# Altium PCB Instrumentation Amplifier (Emergency Version).PcbDoc
Units mil, origin at the board's own origin, x right, y up, seen from the top; angles counter-clockwise.
Board outline 2500 x 1000 mil, 2 copper layers (L1, L2), stack 62.756 mil thick; 18 components, 14 nets, 59 pads, 2 vias.
Unrouted connection lines stored in the file: 11.
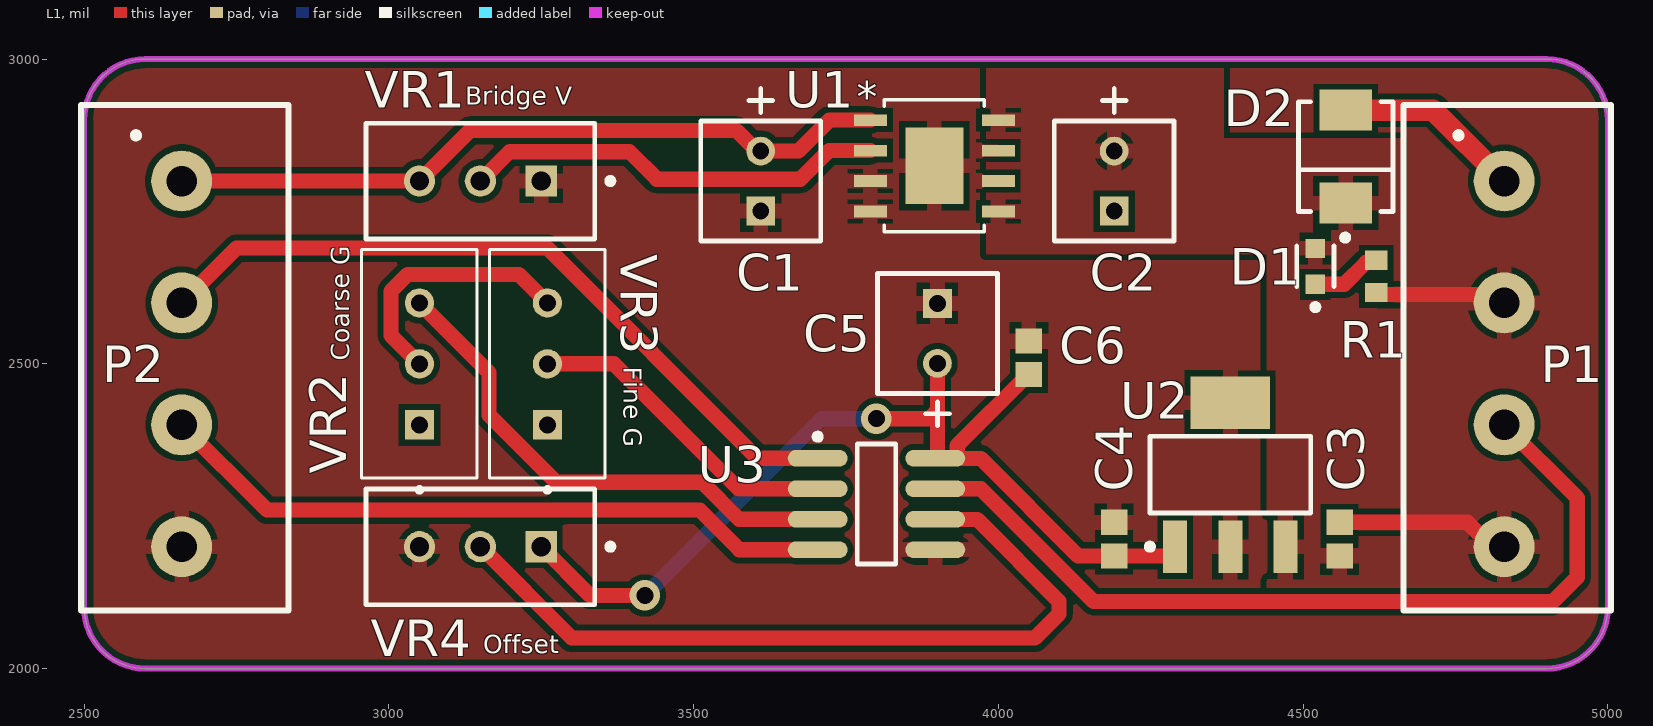
[diagram p0: L1 view]
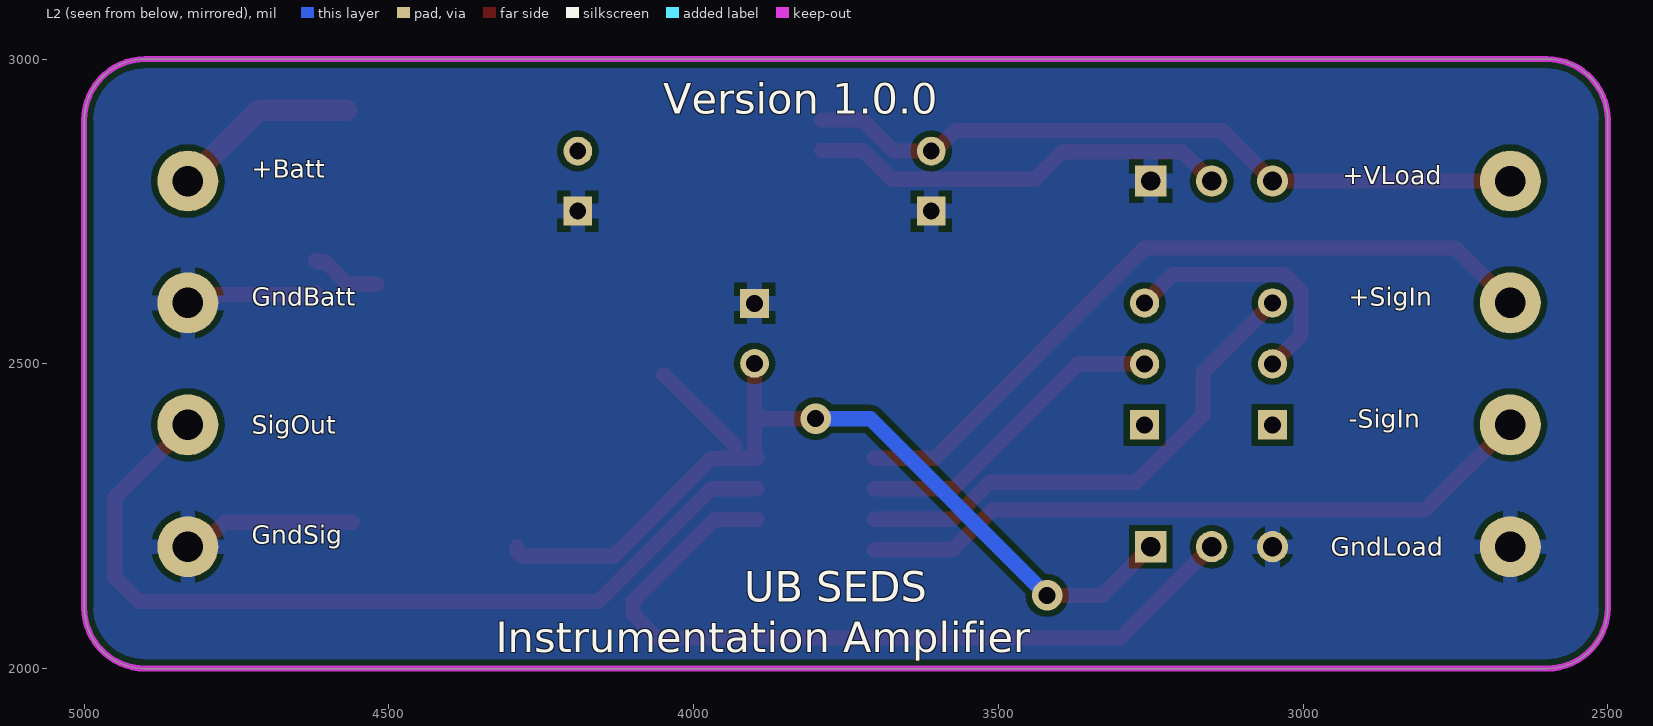
[diagram p1: L2 view, seen from below]
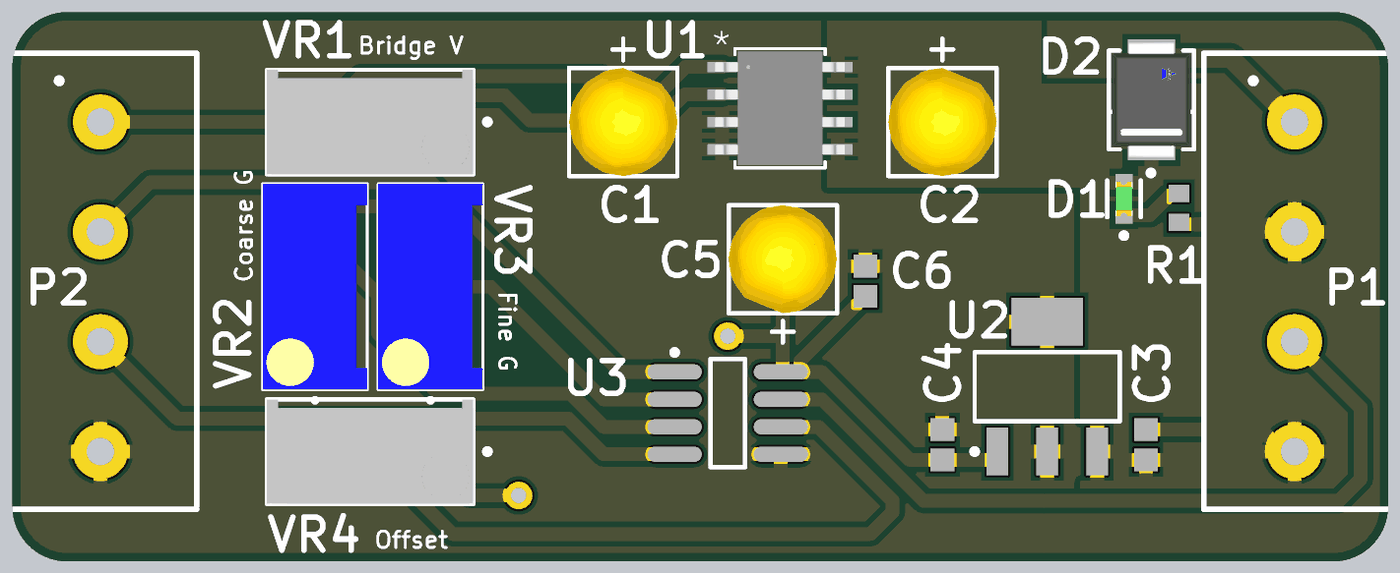
[diagram p2: 3D render of the assembled board from above, using the file's embedded part models]

## Layer stack, top to bottom
Top Solder: solder mask 0.1, Solder Resist, Dk 1
L1: signal copper 1.378
Core: dielectric 60, FR-4, Dk 4.6
L2: signal copper 1.378
Bottom Solder: solder mask 0.1, Solder Resist, Dk 1

## Board outline
4900,2000 ccw(c4900,2100) 5000,2100 5000,2900 ccw(c4900,2900) 4900,3000 2600,3000 ccw(c2600,2900) 2500,2900 2500,2100 ccw(c2600,2100) 2600,2000

## Design rules (kind name [scope] priority, off if disabled: settings)
Clearance [All] p1: gap=10 ignorepadtopadclearanceinfootprint=FALSE except(0: Arc-Hole Track-Hole SMDPad-Hole THPad-Hole Via-Hole Fill-Hole Poly-Hole Region-Hole Text-Hole)
PlaneConnect [All] p1: planeconnectstyle=Relief reliefexpansion=20 reliefentries=4 reliefconductorwidth=25 reliefairgap=10
PolygonConnect [All] p1: connectstyle=Relief reliefconductorwidth=25 reliefentries=4 polygonreliefangle="90 Angle" airgapwidth=10
RoutingVias [All] p1: holewidth=28 width=50 viastyle="Through Hole" minholewidth=28 minwidth=50 maxholewidth=28 maxwidth=50
SolderMaskExpansion [All] p1: expansion=4 istentingtop=FALSE
Width [All] p1: maxlimit=50 minlimit=10 preferedwidth=25
29 further rules are at their usual default settings.

## Components (designator, comment, footprint, x,y, rotation, side; value= is the part's Value field where it differs from the comment)
C1 "10 µF" FP-TAP106K016SCS-MFG 3610,2800 r90 top
C2 "10 µF" FP-TAP106K016SCS-MFG 4190,2800 r90 top
C3 "100 nF" CAPC1608X95X40ML15T15 4560,2212.44 r270 top
C4 "100 nF" CAPC1608X95X40ML15T15 4190,2212.44 r270 top
C5 "10 µF" FP-TAP106K016SCS-MFG 3900,2550 r270 top
C6 "100 nF" CAPC1608X95X40ML15T15 4050,2510 r270 top
D1 "LTST-C191KGKT" FP-LTST-C191KGKT-MFG 4520,2660 r90 top
D2 "VS-10BQ015-M3/5BT" FP-95401-MFG 4570,2840 r90 top value=390pF
P1 "Screw Terminal" "Screw Terminal" 4830,2800 r270 top
P2 "Screw Terminal" "Screw Terminal" 2660,2800 r270 top
R1 "470" RESC1608X55X30NL15T15 4620,2643.43 r270 top
U1 "BD00GA3WEFJ-E2" HTSOP-J8_ROM 3895,2825 r0 top
U2 "MCP1804T-A002I/DB" SOT-223-DB3_N 4380.55,2318.11 r90 top
U3 "AD8221ARZ-R7" ADI-R-8_M 3800,2270 r0 top
VR1 "10K" BOUR-3296W 3150,2800 r180 top
VR2 "20K" TRIM_3296W-1-202LF 3050,2500 r90 top
VR3 "100" TRIM_3296W-1-101LF 3260,2500 r90 top
VR4 "10K" BOUR-3296W 3150,2200 r180 top

## Footprints (in the part's own frame and the unit in brackets; to place one, negate y for a bottom-side part, rotate by r counter-clockwise, add the part's x,y. Pads: shape width x height; smd on the part's side, far side on the other; paste and mask are expansions set on the pad)
ADI-R-8_M [mm] "SOIC, 8-Leads, Body 4.9x3.9mm, Pitch 1.27mm, IPC Low Density"
  oval 2.5x0.7 smd: 1(-2.45,1.905) 2(-2.45,0.635) 3(-2.45,-0.635) 4(-2.45,-1.905) 5(2.45,-1.905) 6(2.45,-0.635) 7(2.45,0.635) 8(2.45,1.905)
  silkscreen extent -2.57,-2.5 0.8,2.93, body extent -2,-2.5 2,2.5, height 1.75
BOUR-3296W [mm] "THD, 3-Leads, Body 9.53x4.83mm, Pitch 2.54mm"
  rect 1.3x1.3 hole 0.8: 1(-2.54,0)
  round 1.3 hole 0.8: 2(0,0) 3(2.54,0)
  silkscreen extent -5.54,-2.41 4.76,2.42, body extent -4.76,-2.4 4.76,2.42, height 11.55
CAPC1608X95X40ML15T15 [mm] "Chip Capacitor, 2-Leads, Body 1.60x0.80mm, IPC Low Density"
  rect 1.05x1.1 smd: 1(-0.7,0) 2(0.7,0)
  body extent -0.88,-0.48 0.87,0.47, height 0.95
FP-95401-MFG [mil]
  rect 67.5x86 smd paste+0 mask+0: 1(-76.25,0) 2(76.25,0)
  silkscreen extent -138,-78 90,78, body extent -114,-81 114,81, height 10
FP-LTST-C191KGKT-MFG [mm]
  rect 0.8x0.8 smd paste+0 mask+0: 1(-0.75,0) 2(0.75,0)
  silkscreen extent -1.82,-0.77 0.85,0.77, body extent -1.25,-0.55 1.25,0.55, height 0.25
FP-TAP106K016SCS-MFG [mm]
  rect 1.2x1.2 hole 0.7 paste-1000 mask+0: 1(-1.25,0)
  round 1.2 hole 0.7 paste-1000 mask+0: 2(1.25,0)
  silkscreen extent -2.5,-2.5 3.85,2.5, body extent -2.6,-2.6 2.6,2.6, height 0.25
HTSOP-J8_ROM [mil]
  rect 54x19 smd paste+0 mask+0: 1(-105,75) 2(-105,25) 3(-105,-25) 4(-105,-75) 5(105,-75) 6(105,-25) 7(105,25) 8(105,75)
  rect 95x126 smd paste-62.5 mask+0: EPAD(0,0)
  silkscreen extent -82,-108 82,108, body extent -118,-104 118,104, height 39
RESC1608X55X30NL15T15 [mm] "Chip Resistor, 2-Leads, Body 1.60x0.80mm, IPC Medium Density"
  rect 0.8x0.95 smd: 1(-0.675,0) 2(0.675,0)
  body extent -0.87,-0.48 0.87,0.48, height 0.55
"Screw Terminal" [mil]
  round 100 hole 50 mask+4: 1(0,0) 2(200,0) 3(400,0) 4(600,0)
  silkscreen extent -125,-165 705,175
SOT-223-DB3_N [mm] "SOT223, 4-Leads, Body 6.5x3.5mm, Pitch 2.3mm, Lead Span 7mm, IPC Medium Density"
  rect 2.2x1 smd: 1(-3,2.3) 2(-3,0) 3(-3,-2.3)
  rect 2.2x3.3 smd: 4(3,0)
  silkscreen extent -3.12,-3.35 1.6,3.47, body extent -1.85,-3.35 1.85,3.35, height 1.8
TRIM_3296W-1-101LF [mm]
  rect 1.218x1.218 hole 0.71: 1(-2.54,0)
  round 1.218 hole 0.71: 2(0,0) 3(2.54,0)
  silkscreen extent -5.35,-2.41 4.76,2.42, body extent -4.76,-2.41 4.76,2.42, height 11.55
TRIM_3296W-1-202LF [mm]
  rect 1.218x1.218 hole 0.71: 1(-2.54,0)
  round 1.218 hole 0.71: 2(0,0) 3(2.54,0)
  silkscreen extent -5.35,-2.41 4.76,2.42, body extent -4.76,-2.41 4.76,2.42, height 11.55

## Part data
C1 C2 C5: library part CMP-04424-000616-1, "CAP TANT 10UF 10% 16V RADIAL", Capacitance=10uF, Case/Package=Dipped, Dielectric Material=Tantalum, ESR (Equivalent Series Resistance)=3.2R, Leakage Current=1.2uA, Max Operating Temperature=125°C, Min Operating Temperature=-55°C, Package Quantity=1000, Tolerance=10%, Voltage=16V, Construction=RADIAL, Diameter=5mm, Dissipation Factor=8%, Features="General Purpose", Height=9mm, Height - Seated (Max)=0.354inch, Lead Diameter=0.5mm, Lead Free="Lead Free", Lead Pitch=2.5mm, Length=9mm, Life (Hours)=1000Hour, Mount="Through Hole", Number of Pins=2, Packaging=Bulk, Polarity=Polar, Radiation Hardening=No, RoHS Compliant=Yes, Series=TAP, Size=9mm, Termination=Radial, Voltage Rating=16V, Voltage Rating (DC)=16V
C3 C4 C6: library part CMP-2006-01550-1, Manufacturer=Vitramon, Part Number=VJ0603Y104KXQCW1BC
D1: library part CMP-2000-05198-2, "LED GREEN CLEAR SMD", Case Code (Imperial)=0603, Case Code (Metric)=1608, Color=Green, Forward Current=30mA, Forward Voltage=2V, Lens Color=Colorless, Max Operating Temperature=85°C, Max Power Dissipation=75mW, Min Operating Temperature=-55°C, Package Quantity=1, Reverse Voltage=5V, Test Current=20mA, Case/Package=0603, Depth=0.8mm, Dominant Wavelength=571nm, Height=0.55mm, Illumination Color=Green, Lead Free="Lead Free", Length=1.6mm, Lens Style=Rectangular, Lens Transparency=Clear, Luminous Intensity=35mcd, Mount="Surface Mount", Number of Elements=1, Number of LEDs=1, Number of Pins=2, Packaging="Tape and Reel", Power Dissipation=75mW, Power Rating=75mW, Radiation Hardening=No, Viewing Angle=130°, Wavelength=574nm, Width=0.8mm
D2: library part CMP-02539-000017-1, "DIODE SCHOTTKY 15V 1A DO214AA", Capacitance=390pF, Forward Current=1A, Manufacturer=Vishay, Max Junction Temp=+125°C, Max Repetitive Reverse Voltage=15V, Max Surge Forward Current=40A, Package=95401, Peak Reverse Current=0.5mA, Temperature="-55°C to +125°C", Temperature Range Low=-55°C, Automotive=No, Category=Diode, ComponentLink2Description=Datasheet, ComponentLink2URL=http://www.vishay.com/docs/93349/vs-10bq015m.pdf, Device Class L1="Discrete Semiconductors", Device Class L2=Diodes, Device Class L3="Schottky Diodes", Digikey Description="DIODE SCHOTTKY 15V 1A DO214AA", Footprint Url=http://www.vishay.com/docs/95401/smb.pdf, Height=2.44mm, Lead Free=Yes, Manufacturer Part Number=VS-10BQ015-M3/5BT, Mouser Description="VS-10BQ015 Series 15 V 1 A SMT Schottky Rectifier - SMB (DO-214AA)", Octopart=https://octopart.com/vs-10bq015-m3%2F5bt-vishay-39003459, Reverse Voltage=15V, RoHS=TRUE, Standoff Height=0mm, Temperature Range High=+125°C
P1 P2: "200 mil pitch"
R1: library part CMP-2000-00795-1, "ERJ-3GEYJ471V", Manufacturer=Panasonic, Part Number=ERJ-3GEYJ471V
U1: "No Description Available", Mfr_Name="ROHM Semiconductor", Copyright="Copyright (C) 2022 Ultra Librarian. All rights reserved.", Digi-Key_Part_Number_1=BD00GA3WEFJ-E2TR-ND, Digi-Key_Part_Number_2=BD00GA3WEFJ-E2CT-ND, Digi-Key_Part_Number_3=BD00GA3WEFJ-E2DKR-ND, Manufacturer_Part_Number=BD00GA3WEFJ-E2, RefDes=RefDes, Type=DEV
U2: library part CMP-0136-00501-1, "150 mA, 28V LDO Regulator With Shutdown, 3-Pin SOT-223, Industrial Temperature, Tape and Reel", DatasheetVersion="revB, Nov-2009", PackageDescription="3-Lead Plastic Small Outline Transistor (DB) [SOT-223]", PackageReference=SOT-223-DB3, PackageVersion="revBB, Aug-2009"
U3: library part CMP-0934-00044-1, "Precision Instrumentation Amplifier, 2 V/us, -40 to 125 degC, 8-Pin SOIC (R-8), RoHS, Tape and Reel", Manufacturer="Analog Devices", Quiescent Current="0.9 mA Typ.", Temperature Range="-40 to 125 degC", -3dB Bandwidth@G="1=825 kHz", ComponentLink1Description="Manufacturer URL", ComponentLink1URL=http://www.analog.com/en/index.html, ComponentLink2Description=Datasheet, ComponentLink2URL=http://www.analog.com/static/imported-files/data_sheets/AD8221.pdf, ComponentLink3Description="Package Specification", ComponentLink3URL=http://www.analog.com/static/imported-files/packages/PKG_PDF/SOIC_Narrow%20(R)/R_8.pdf, DatasheetVersion="Rev. C", Mounting Technology="Surface Mount", PackageDescription="8-Pin Standard Small Outline Package, Body 4.9 x 3.9 mm, Pitch 1.27 mm", PackageVersion=Jun-06, Packing="Tape and Reel", PartNumber=AD8221ARZ-R7, RoHS=TRUE, Slew Rate@G="1=2 V/us Typ.", VIO="60 uV Max."
VR1 VR4: library part CMP-1747-00001-1, "3296W-1-103LF / Square Trimpot(R) Trimming Potentiometer, 10 KOhm, +/- 10%, 0.5 W, -55 to 125 degC, 3-Pin THD, RoHS, Tube", Case Code (Imperial)=0603, Case Code (Metric)=1608, Max Operating Temperature="155 degC", Min Operating Temperature="-55 degC", Package Quantity=5000, Power Rating="100 mW", Resistance="120 Ohm", Tolerance=1%, Type (Resistor)="Thick Film", Voltage Rating="75 V", Case\Package=0603, ComponentLink1Description="Manufacturer URL", ComponentLink1URL=http://www.bourns.com/, ComponentLink2Description=Datasheet, ComponentLink2URL=http://www.bourns.com/docs/Product-Datasheets/3296.pdf, DatasheetVersion=May-16, Height="0.45 mm", Length="1.55 mm", Mount="Surface Mount", PackageDescription="3-Pin Through Hole Device, Body 9.53 x 4.83 mm, Pitch 2.54 mm", PackageReference=3296W, Packaging="Tape and Reel", Pins=2, Radiation Hardening=No, REACH SVHC=Unknown, RoHSCompliant=true, Weight="7.1E-05 oz", Width="0.85 mm"
VR2: library part 3296W-1-202LF, "3296W-1-202LF / 2 kOhms 0.5W, 1/2W PC Pins Through Hole Trimmer Potentiometer Cermet 25.0 Turn Top Adjustment", Package="SOT-23-5 Bourns", Availability="In Stock", Check_prices=https://www.snapeda.com/parts/3296W-1-202LF/Bourns/view-part/?ref=eda, MF=Bourns, MP=3296W-1-202LF, Price=None, Purchase-URL=https://pricing.snapeda.com/search/part/3296W-1-202LF/?ref=eda, SnapEDA_Link=https://www.snapeda.com/parts/3296W-1-202LF/Bourns/view-part/?ref=snap
VR3: library part 3296W-1-101LF, "3296W-1-101LF / 100 Ohms 0.5W, 1/2W PC Pins Through Hole Trimmer Potentiometer Cermet 25.0 Turn Top Adjustment", Package="SOT-23-5 Bourns", Availability="In Stock", Check_prices=https://www.snapeda.com/parts/3296W-1-101LF/Bourns/view-part/?ref=eda, MF=Bourns, MP=3296W-1-101LF, Price=None, Purchase-URL=https://pricing.snapeda.com/search/part/3296W-1-101LF/?ref=eda, SnapEDA_Link=https://www.snapeda.com/parts/3296W-1-101LF/Bourns/view-part/?ref=snap

## Via types
v1: diameter 50, hole 28, L1 to L2, 2 vias

## Nets (pads, with @x,y where several pads share a name; then routed paths per layer and width w, separated by ;. In a path a pad name is that pad's centre, name@x,y a point inside that pad or via, vN(x,y) a via of type N, cw(c..) or ccw(c..) an arc to the next point about the centre after c; other vN are vias at no path point)
+10V: C4.2 C5.2 C6.2 U2.1 U3.8 VR4.1 | length 1622.9
  L1 w25: VR4.1 3330,2120 v1(3420,2120) ; v1(3800,2410) 3886.52,2410 3900,2423.48 ; U3.8 U3.8@3898.82,2345 ; C5.2 3900,2423.48 ; U3.8@3931.2,2344.51 3971.22,2344.51 4130.85,2184.88 4282.81,2184.88 4290,2192.07 U2.1 ; C6.2 4049.02,2482.44 3932.38,2365.8 3932.38,2346.18 3931.2,2345 U3.8@3898.82,2345 ; U3.8@3898.82,2345 3900,2346.18 3900,2423.48
  L2 w25: v1(3420,2120) 3710,2410 v1(3800,2410)
+Batt: D2.2 P1.1 | length 308.2
  L1 w35: D2.2 4713.75,2916.25 P1.1
+SigIn: P2.2 U3.1 | length 1223.7
  L1 w25: P2.2 2750,2690 3260,2690 3605,2345 U3.1
+VIn: C2.2 C3.2 D1.2 D2.1 U1.5 U1.8 U2.3
+VLoad: C1.2 P2.1 U1.1 VR1.3 | length 1199.5
  L1 w25: P2.1 VR1.3 3133.09,2883.09 3570.1,2883.09 3603.98,2849.21 C1.2 3671.87,2849.21 3722.65,2900 U1.1
-SigIn: P2.3 U3.4 | length 1128.5
  L1 w25: P2.3 2800,2260 3510,2260 3575,2195 U3.4
GainR1: U3.3 VR2.3 | length 841.5
  L1 w25: VR2.3 3164.38,2485.62 3164.38,2415.84 3274.38,2305.85 3513.65,2305.85 3574.5,2245 U3.3
GainR2: U3.2 VR3.2 | length 528.5
  L1 w25: VR3.2 3368.99,2500 3573.99,2295 U3.2
GND: C1.1 C2.1 C3.1 C4.1 C5.1 C6.1 P1.2 P1.4 P2.4 R1.2 U1.3 U1.4 U1.6 U1.7 U1.EPAD U2.2 U2.4 U3.5 VR1.1 VR4.3 | length 503.5
  L1 w25: C3.1 4769.71,2240 4809.71,2200 P1.4 ; R1.2 4623.25,2613.6 4816.4,2613.6 P1.2
NetD1_1: D1.1 R1.1 | length 116.4
  L1 w25: D1.1 4567.35,2630.47 4603.63,2666.75 4616.75,2666.75 R1.1
NetU1_2: U1.2 VR1.2 | length 698
  L1 w25: VR1.2 3198.09,2848.09 3394.64,2848.09 3439.64,2803.09 3675.24,2803.09 3722.15,2850 U1.2
NetVR2_2: VR2.2 VR3.3 | length 425.5
  L1 w25: VR2.2 3003.52,2546.48 3003.52,2619.25 3030.75,2646.48 3213.52,2646.48 VR3.3
Ref_Offset: U3.6 VR4.2 | length 1307.9
  L1 w25: VR4.2 3300,2050 4060,2050 4099.64,2089.64 4099.64,2110.36 3965.49,2244.51 3896.95,2244.51 U3.6
SigOut: P1.3 U3.7 | length 1446.4
  L1 w25: U3.7 3971.23,2295 4156.23,2110 4910,2110 4950,2150 4950,2280 P1.3
pads on no net: VR2.1 VR3.1

## Polygon pours and split planes (outlines as drawn)
GND on L2 "GND_L02_P000" (solid, pour order 0): 4900,2000 ccw(c4900,2100) 5000,2100 5000,2900 ccw(c4900,2900) 4900,3000 2600,3000 ccw(c2600,2900) 2500,2900 2500,2100 ccw(c2600,2100) 2600,2000
+VIn on L1 "+VIN_L01_P006" (solid, remove dead copper, pour order 6): 4440,2130 4660,2130 4660,2870 4370,2870 4370,2990 3980,2990 3980,2680 4440,2680
GND on L1 "GND_L01_P007" (solid, remove dead copper, pour order 7): 4900,2000 ccw(c4900,2100) 5000,2100 5000,2900 ccw(c4900,2900) 4900,3000 2600,3000 ccw(c2600,2900) 2500,2900 2500,2100 ccw(c2600,2100) 2600,2000

## Keep-outs
Keep-Out Layer:
  the board outline again, w10

## Silkscreen, mask and mechanical layers (free items; w line width, h text height)
Top Overlay:
  text "Bridge V" at 3125,2925 h30
  text "Coarse G" at 2935,2505 h30 r90
  text "Fine G" at 3385,2495 h30 r270
  text "Offset" at 3155,2025 h30
Bottom Overlay:
  text "Version 1.0.0" at 4049.9,2910 h50
  text "+Batt" at 4725,2805 h30
  text "+VLoad" at 2934.95,2795 h30
  text "+SigIn" at 2924.95,2595 h30
  text "GndBatt" at 4725,2595 h30
  text "-SigIn" at 2925,2395 h30
  text "SigOut" at 4725,2385 h30
  text "GndSig" at 4725,2205 h30
  text "GndLoad" at 2955,2185 h30
  text "UB SEDS" at 3916.61,2110 h50
  text "Instrumentation Amplifier" at 4324.81,2026.66 h50

## Text inside footprints (layer, text, board x,y; h text height)
U1: Top 3D Body "*" at 3820.5,2875.5 h50; Top Overlay "*" at 3767.5,2914 h50